# EAGLE board frame (EAGLE 5.10)

Size 293.56 x 192.12 mm. Coordinates in mm from the lower left corner, seen from the top.
Outline: 41.56,94.56 arc71 39.81,93.31
Outline: 39.81,93.31 arc-25 37.81,90.06
Outline: 37.81,90.06 arc100 38.06,87.31
Outline: 41.56,94.56 84.31,94.56
Outline: 97.56,41.56 arc71 98.81,39.81
Outline: 97.56,41.56 97.56,84.31
Outline: 150.56,97.56 arc71 152.31,98.81
Outline: 152.31,98.81 arc-25 154.31,102.06
Outline: 154.31,102.06 arc100 154.06,104.81
Outline: 150.56,97.56 107.81,97.56
Outline: 94.56,41.56 arc-71 93.31,39.81
Outline: 93.31,39.81 arc25 90.06,37.81
Outline: 94.56,41.56 94.56,84.31
Outline: 150.56,94.56 arc-71 152.31,93.31
Outline: 152.31,93.31 arc25 154.31,90.06
Outline: 154.31,90.06 arc-100 154.06,87.31
Outline: 150.56,94.56 107.81,94.56
Outline: 41.56,94.56 arc71 39.81,93.31
Outline: 39.81,93.31 arc-25 37.81,90.06
Outline: 37.81,90.06 arc100 38.06,87.31
Outline: 38.06,87.31 arc-15 48.06,78.81 arc87 75.81,79.31 88.56,91.56 arc135 87.31,94.56 41.56,94.56
Outline: 94.56,41.56 arc-71 93.31,39.81
Outline: 93.31,39.81 arc25 90.06,37.81
Outline: 90.06,37.81 arc-100 87.31,38.06 arc15 78.81,48.06 arc-87 79.31,76.31 91.56,89.06 arc-135 94.56,87.81 94.56,41.56
Outline: 97.56,41.56 arc71 98.81,39.81
Outline: 98.81,39.81 arc-25 102.06,37.81 arc100 104.81,38.06 arc-15 113.31,48.06 arc87 112.81,75.81 100.56,88.56 arc135 97.56,87.31 97.56,41.56
Outline: 150.56,94.56 arc-71 152.31,93.31
Outline: 152.31,93.31 arc25 154.31,90.06
Outline: 154.31,90.06 arc-100 154.06,87.31
Outline: 154.06,87.31 arc15 144.06,78.81 arc-87 115.81,79.31 103.06,91.56 arc-135 104.31,94.56 150.56,94.56
Outline: 150.56,97.56 arc71 152.31,98.81
Outline: 152.31,98.81 arc-25 154.31,102.06
Outline: 154.31,102.06 arc100 154.06,104.81
Outline: 154.06,104.81 arc-15 144.06,113.31 arc87 116.31,112.81 103.56,100.56 arc135 104.81,97.56 150.56,97.56
Outline: 12.06,91.06 arc-270 12.06,101.06 arc76 54.56,134.31 arc-86 57.81,137.56 arc76 91.06,180.06 arc-270 101.06,180.06 arc76 134.31,137.56 arc-86 137.56,134.31 arc76 180.06,101.06 arc-270 180.06,91.06 arc76 137.56,57.81 arc-86 134.31,54.56 arc76 101.06,12.06 arc-270 91.06,12.06 arc76 57.81,54.56 arc-86 54.56,57.81 arc76 12.06,91.06
Outline: 286.06,88.31 arc270 289.81,84.56 arc-180 291.56,84.56 arc-90 286.06,79.06 arc74 285.06,77.81 arc29 284.81,15.06 arc74 286.06,14.06 arc-87 291.56,8.56 arc-180 289.81,8.56 arc270 286.06,4.81 arc-180 286.06,3.06 arc-90 280.56,8.56 arc74 279.31,9.56 arc29 216.56,9.81 arc74 215.56,8.56 arc-87 210.06,3.06 arc-180 210.06,4.81 arc270 206.31,8.56 arc-180 204.56,8.56 arc-90 210.06,14.06 arc74 211.06,15.31 arc29 211.31,78.06 arc74 210.06,79.06 arc-87 204.56,84.56 arc-180 206.31,84.56 arc270 210.06,88.31 arc-180 210.06,90.06 arc-90 215.56,84.56 arc74 216.81,83.56 arc29 279.56,83.31 arc74 280.56,84.56 arc-87 286.06,90.06 arc-180 286.06,88.31
Outline: 12.06,94.06 arc-20 30.31,90.81 arc112 37.56,96.06 arc112 30.31,101.31 arc-20 12.06,98.06 arc90 10.06,96.06 arc90 12.06,94.06
Outline: 98.06,12.06 arc-20 101.31,30.31 arc112 96.06,37.56 arc112 90.81,30.31 arc-20 94.06,12.06 arc90 96.06,10.06 arc90 98.06,12.06
Outline: 180.06,98.06 arc-20 161.81,101.31 arc112 154.56,96.06 arc112 161.81,90.81 arc-20 180.06,94.06 arc90 182.06,96.06 arc90 180.06,98.06
Outline: 94.06,180.06 arc-20 90.81,161.81 arc112 96.06,154.56 arc112 101.31,161.81 arc-20 98.06,180.06 arc90 96.06,182.06 arc90 94.06,180.06
Outline: 94.56,150.56 arc71 93.31,152.31 arc-25 90.06,154.31 arc100 87.31,154.06 arc-15 78.81,144.06 arc87 79.31,116.31 91.56,103.56 arc135 94.56,104.81 94.56,150.56
Outline: 65.56,129.81 arc-90 66.06,136.31 arc-18 69.31,137.81 arc-127 71.06,136.31 arc22 70.31,128.31 arc-143 67.81,127.06 65.56,129.81
Outline: 41.56,97.56 arc-71 39.81,98.81 arc25 37.81,102.06 arc-100 38.06,104.81 arc15 48.06,113.31 arc-87 76.31,112.81 89.06,100.56 arc-135 87.81,97.56 41.56,97.56
Outline: 288.06,183.31 arc87 282.56,177.81 arc-7 274.56,168.81 255.56,150.06 arc1 252.31,146.81 arc-43 250.06,145.81 arc-43 247.81,146.81 arc1 244.56,150.06 225.56,168.81 arc-7 217.56,177.81 arc90 212.06,183.31 arc90 206.56,177.81 arc87 212.06,172.31 arc-7 221.06,164.31 239.81,145.31 arc1 243.06,142.06 arc-43 244.06,139.81 arc-43 243.06,137.56 arc1 239.81,134.31 221.06,115.31 arc-7 212.06,107.31 arc90 206.56,101.81 arc90 212.06,96.31 arc87 217.56,101.81 arc-7 225.56,110.81 244.56,129.56 arc1 247.81,132.81 arc-43 250.06,133.81 arc-43 252.31,132.81 arc1 255.56,129.56 274.56,110.81 arc-7 282.56,101.81 arc90 288.06,96.31 arc90 293.56,101.81 arc87 288.06,107.31 arc-7 279.06,115.31 260.31,134.31 arc1 257.06,137.56 arc-43 256.06,139.81 arc-43 257.06,142.06 arc1 260.31,145.31 279.06,164.31 arc-7 288.06,172.31 arc90 293.56,177.81 arc93 288.06,183.31
Outline: 62.56,126.56 arc90 56.06,126.06 arc18 54.56,122.81 arc127 56.06,121.06 arc-22 64.06,121.81 arc143 65.31,124.31 62.56,126.56
Outline: 62.31,65.56 arc-90 55.81,66.06 arc-18 54.31,69.31 arc-127 55.81,71.06 arc22 63.81,70.31 arc-143 65.06,67.81 62.31,65.56
Outline: 65.56,62.56 arc90 66.06,56.06 arc18 69.31,54.56 arc127 71.06,56.06 arc-22 70.31,64.06 arc143 67.81,65.31 65.56,62.56
Outline: 126.56,62.31 arc-90 126.06,55.81 arc-18 122.81,54.31 arc-127 121.06,55.81 arc22 121.81,63.81 arc-143 124.31,65.06 126.56,62.31
Outline: 129.56,65.56 arc90 136.06,66.06 arc18 137.56,69.31 arc127 136.06,71.06 arc-22 128.06,70.31 arc143 126.81,67.81 129.56,65.56
Outline: 129.81,126.56 arc-90 136.31,126.06 arc-18 137.81,122.81 arc-127 136.31,121.06 arc22 128.31,121.81 arc-143 127.06,124.31 129.81,126.56
Outline: 97.56,150.56 arc-71 98.81,152.31 arc25 102.06,154.31 arc-100 104.81,154.06 arc15 113.31,144.06 arc-87 112.81,115.81 100.56,103.06 arc-135 97.56,104.31 97.56,150.56
Outline: 126.56,129.56 arc90 126.06,136.06 arc18 122.81,137.56 arc127 121.06,136.06 arc-22 121.81,128.06 arc143 124.31,126.81 126.56,129.56
Copper layers (1*16): Top 0.035mm / dielectric 1.5mm / Bottom 0.035mm
Design rules "default": minimum track width 10mil, minimum drill 24mil, track to track 8mil, track to pad 8mil, pad to pad 8mil, via to via 8mil, smd to smd 8mil, copper to edge 40mil, drill to drill 8mil, minimum pad ring 10mil, minimum via ring 8mil, stop-mask expansion 4mil, vias tented up to drill 0mil, thermal gap 10mil
Holes 3 mm at 58.06,134.06 134.06,134.06 134.06,58.06 58.06,58.06 96.06,96.06 7.06,96.06 96.06,7.06 185.06,96.06 96.06,185.31 212.06,101.81 288.06,101.81 288.06,177.81 212.06,177.81 250.06,139.81

## Footprints (pad centres in the part's own frame; a part is rotated, then mirrored left to right if it is on the bottom)
SOT23-3 = smd 0.8 x 0.9: 1 -0.95,-1; 2 0.95,-1; 3 0,1.1
PAD.03X.05 = smd 1.27 x 1.27: P$1 0,0

## Placement (x,y rotation side)
Q2  MOSFET-NCHANNELSMD  [SOT23-3]  1.56,-2.69 0 top
Q3  MOSFET-NCHANNELSMD  [SOT23-3]  9.81,-2.94 0 top
Q4  MOSFET-NCHANNELSMD  [SOT23-3]  1.56,-7.19 0 top  (outside the outline)
Q5  MOSFET-NCHANNELSMD  [SOT23-3]  9.81,-7.19 0 top  (outside the outline)
Q6  MOSFET-NCHANNELSMD  [SOT23-3]  1.56,-11.44 0 top  (outside the outline)
Q7  MOSFET-NCHANNELSMD  [SOT23-3]  9.81,-11.44 0 top  (outside the outline)
TP36  TEST-POINT3X5  [PAD.03X.05]  1.56,-14.94 0 top  (outside the outline)
TP37  TEST-POINT3X5  [PAD.03X.05]  5.06,-14.94 0 top  (outside the outline)
TP38  TEST-POINT3X5  [PAD.03X.05]  8.56,-14.94 0 top  (outside the outline)
TP39  TEST-POINT3X5  [PAD.03X.05]  12.06,-14.94 0 top  (outside the outline)
TP40  TEST-POINT3X5  [PAD.03X.05]  15.56,-14.94 0 top  (outside the outline)
TP41  TEST-POINT3X5  [PAD.03X.05]  1.56,-18.44 0 top  (outside the outline)
TP42  TEST-POINT3X5  [PAD.03X.05]  5.06,-18.44 0 top  (outside the outline)
TP43  TEST-POINT3X5  [PAD.03X.05]  8.56,-18.44 0 top  (outside the outline)
TP44  TEST-POINT3X5  [PAD.03X.05]  12.06,-18.44 0 top  (outside the outline)
TP45  TEST-POINT3X5  [PAD.03X.05]  15.56,-18.44 0 top  (outside the outline)
TP46  TEST-POINT3X5  [PAD.03X.05]  1.56,-21.94 0 top  (outside the outline)
TP47  TEST-POINT3X5  [PAD.03X.05]  5.06,-21.94 0 top  (outside the outline)

## Library data of the parts
Q2-Q7 TP36-TP47 = SparkFun

## Nets
GND: Q2.2 Q3.2 Q4.2 Q5.2 Q6.2 Q7.2
M1: Q2.3 TP36.P$1
M2: Q3.3 TP38.P$1
M3: Q6.3 TP44.P$1
M4: Q4.3 TP40.P$1
M5: Q5.3 TP42.P$1
M6: Q7.3 TP46.P$1
TB1: Q2.1
TB2: Q3.1
TB3: Q6.1
TB4: Q4.1
TB5: Q5.1
TB6: Q7.1
VIN: TP37.P$1 TP39.P$1 TP41.P$1 TP43.P$1 TP45.P$1 TP47.P$1

## Tracks (layer width: path | path; a pad name or v marks a point on that pad's centre or on a via)
GND  (5 unrouted)
M1  (1 unrouted)
M2  (1 unrouted)
M3  (1 unrouted)
M4  (1 unrouted)
M5  (1 unrouted)
M6  (1 unrouted)
VIN  (5 unrouted)